# Altium PCB NE5532+TDA2030A.PcbDoc
Units mm, origin at the board's own origin, x right, y up, seen from the top; angles counter-clockwise.
Board outline 95.25 x 80.25 mm, 2 copper layers (Top Layer, Bottom Layer); 93 components, 52 nets, 243 pads, 17 vias.
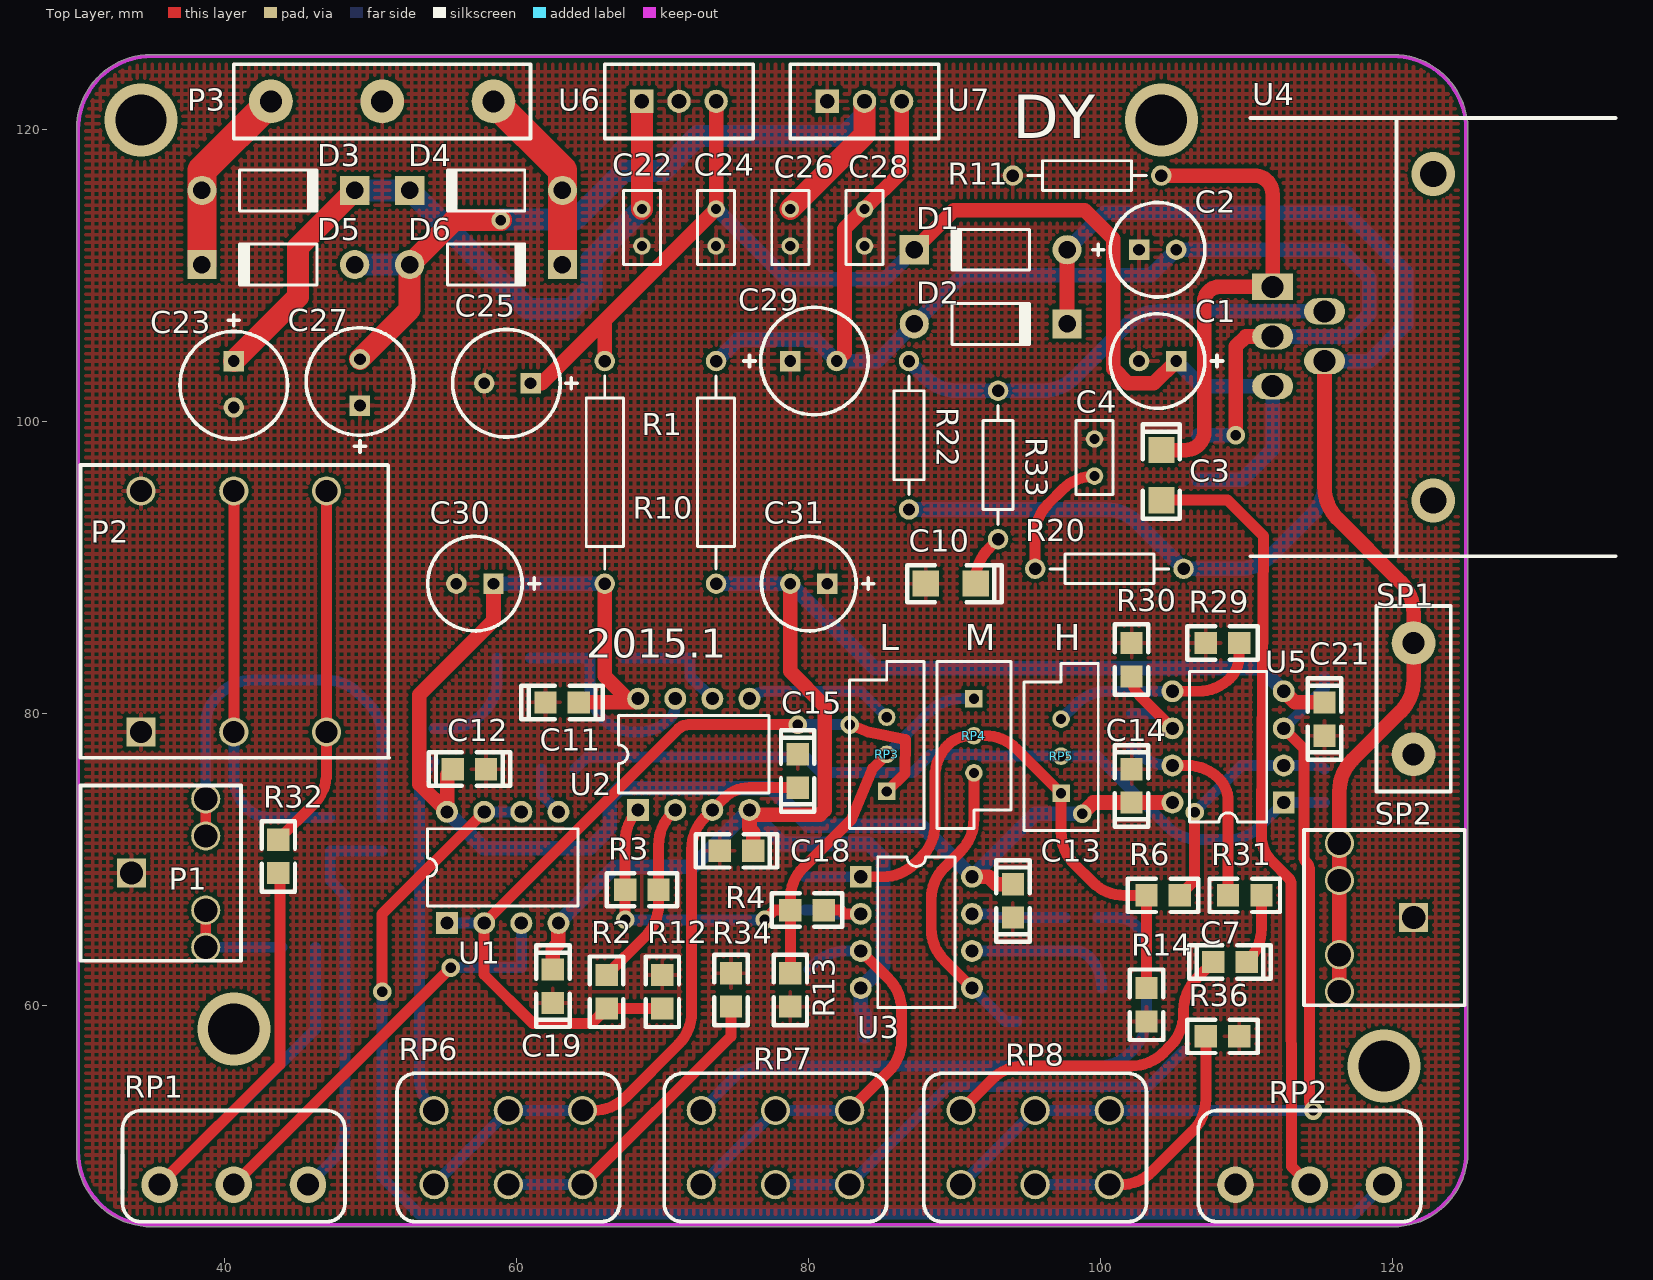
[diagram p0: Top Layer view]
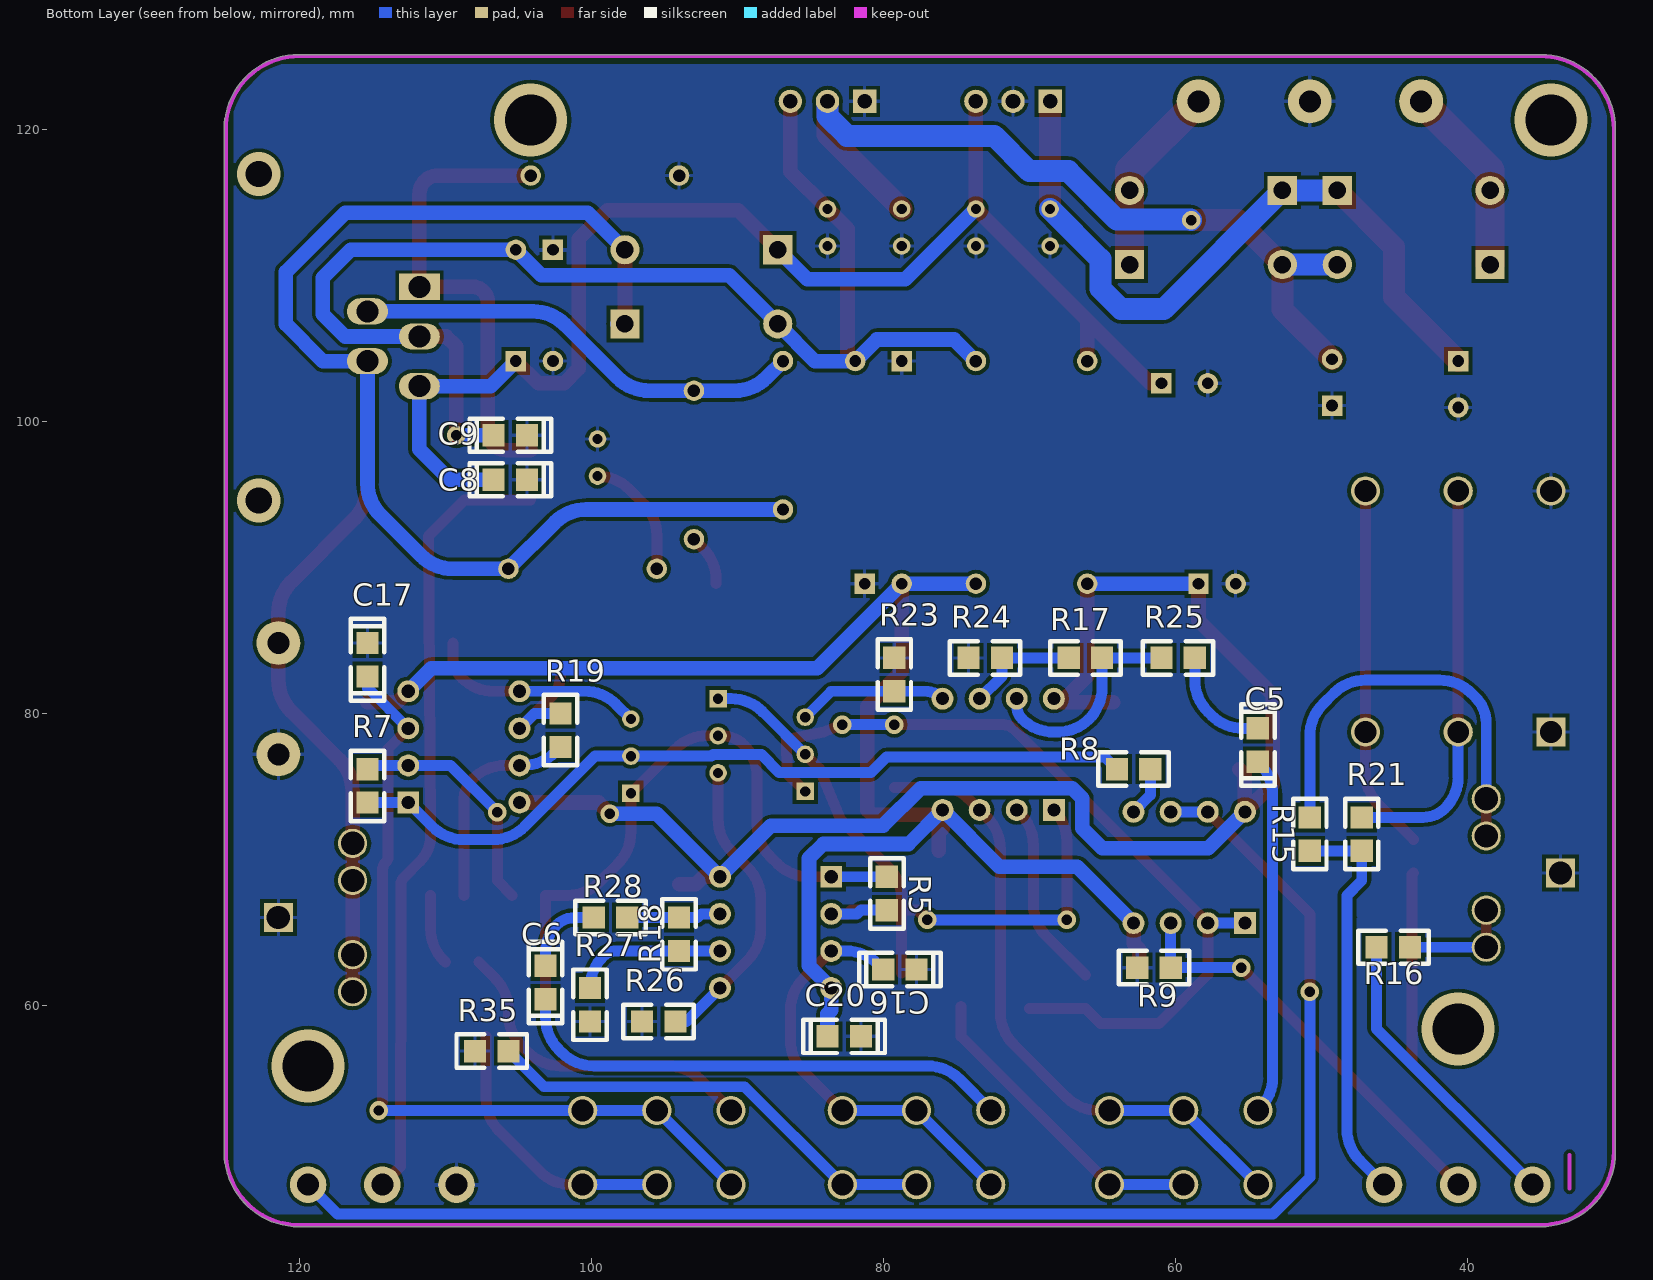
[diagram p1: Bottom Layer view, seen from below]

## Layer stack, top to bottom
Top Layer: signal copper 0.0356
Dielectric: dielectric 0.32, FR-4, Dk 4.8
Bottom Layer: signal copper 0.0356

## Board outline
29.873,50 cw(c30,50) 29.873,50.001 29.873,120 cw(c35,120) 35,125.127 cw(c35,125) 35.001,125.127 120,125.127 cw(c120,120) 125.127,120 cw(c125,120) 125.127,119.999 125.127,50 cw(c120,50) 120,44.873 cw(c120,45) 119.999,44.873 35,44.873 cw(c35,50)

## Design rules (kind name [scope] priority, off if disabled: settings)
Clearance [All] p1: gap=0.25
ComponentClearance [All] p1: gap=0.254 collisioncheckmode=0
PolygonConnect [All] p1: connectstyle=Relief reliefconductorwidth=0.254 reliefentries=4 polygonreliefangle="90 Angle"
RoutingCorners [All] p1: cornerstyle=Round minsetback=2.54 maxsetback=5
RoutingTopology [InNet('GND')] p1: topology=Vertical
RoutingVias [All] p1: holewidth=0.711 width=1.27 viastyle="Through Hole" minholewidth=0.711 minwidth=1.27 maxholewidth=0.711 maxwidth=1.27
SolderMaskExpansion [All] p1: expansion=0.102
TestPointUsage [All] p1: valid=0 allowmultiple=FALSE
Testpoint [All] p1: side=15 testpointundercomponent=TRUE minsize=1.016 maxsize=2.54 preferedsize=1.524 minholesize=0 maxholesize=1.016 preferedholesize=0.813 testpointgrid=0.025 style=1023 order=-539222988
Width Width_3 [InNet('NetR22_2')] p1: maxlimit=1 minlimit=1 preferedwidth=1
Width [InNet('NetC3_1')] p2: maxlimit=1 minlimit=1 preferedwidth=1
Width OUT [InNet('NetD1_1')] p3: maxlimit=1 minlimit=1 preferedwidth=1
Width GND [InNet('GND')] p4: maxlimit=0.1 minlimit=0.1 preferedwidth=0.1
Width -12V [InNet('-12V')] p5: maxlimit=1 minlimit=1 preferedwidth=1
Width +12V [InNet('+12V')] p6: maxlimit=1 minlimit=1 preferedwidth=1
Width V- [InNet('V-')] p7: maxlimit=1 minlimit=1 preferedwidth=1
Width V+ [InNet('V+')] p8: maxlimit=1 minlimit=1 preferedwidth=1
Width 7912 [InNet('7912')] p9: maxlimit=1.5 minlimit=1.5 preferedwidth=1.5
Width 7812 [InNet('7812')] p10: maxlimit=1.5 minlimit=1.5 preferedwidth=1.5
Width Width_2 [InNet('NetD4_1')] p11: maxlimit=2 minlimit=2 preferedwidth=2
Width Width_1 [InNet('NetD3_1')] p12: maxlimit=2 minlimit=2 preferedwidth=2
Width ALL [All] p13: maxlimit=1 minlimit=0.25 preferedwidth=0.75
15 further rules are at their usual default settings.

## Components (designator, comment, footprint, x,y, rotation, side; value= is the part's Value field where it differs from the comment)
C1 "U4" "C 6X12" 105.156,104.14 r180 top
C2 "U4" "C 6X12" 102.616,111.76 r0 top
C3 "Cap Pol1" c1206 104.14,98.044 r270 top
C4 "Cap" RAD-0.1 99.568,97.536 r90 top
C5 "473" c0805 54.356,76.708 r90 bottom
C6 "103" c0805 103.124,60.452 r90 bottom
C7 "222" c0805 107.696,62.992 r0 top
C8 "U4" c0805 106.68,96.012 r180 bottom
C9 "U4" C0805 106.68,99.06 r180 bottom
C10 "Cap Pol1" c1206 91.44,88.9 r180 top
C11 "U1" C0805 61.976,80.772 r0 top
C12 "U2" C0805 57.912,76.2 r180 top
C13 "U3" C0805 93.98,66.04 r90 top
C14 "U5" C0805 102.108,76.2 r270 top
C15 "473" c0805 79.248,77.216 r270 top
C16 "103" c0805 77.724,62.484 r0 bottom
C17 "222" c0805 115.316,84.836 r270 bottom
C18 "U1" C0805 76.2,70.612 r180 top
C19 "U2" C0805 62.484,62.484 r270 top
C20 "U3" C0805 83.82,57.912 r180 bottom
C21 "U5" C0805 115.316,80.772 r270 top
C22 "U4" RAD-0.1 68.58,113.284 r270 top
C23 "25V" "C 8X12" 40.64,104.14 r270 top
C24 "U4" RAD-0.1 73.66,113.284 r270 top
C25 "25V" "C 8X12" 60.96,102.616 r180 top
C26 "U4" RAD-0.1 78.74,113.284 r270 top
C27 "25V" "C 8X12" 49.276,101.092 r90 top
C28 "U4" RAD-0.1 83.82,113.284 r270 top
C29 "25V" "C 8X12" 78.74,104.14 r0 top
C30 "25V" "C 6X12" 58.42,88.9 r180 top
C31 "25V" "C 6X12" 81.28,88.9 r180 top
D1 "1N4007" DIO10.46-5.3x2.8 92.456,111.76 r180 top
D2 "1N4007" DIO10.46-5.3x2.8 92.456,106.68 r0 top
D3 "1N4007" DIO10.46-5.3x2.8 43.688,115.824 r0 top
D4 "1N4007" DIO10.46-5.3x2.8 57.912,115.824 r180 top
D5 "1N4007" DIO10.46-5.3x2.8 43.688,110.744 r180 top
D6 "1N4007" DIO10.46-5.3x2.8 57.912,110.744 r0 top
P1 "Header 5" 3.5MM 33.64,69.088 r0 top
P2 "Header 6" 6.5MM 34.29,78.74 r90 top
P3 "Header 3" h3 38.1,124.46 r0 top
R1 "1W" AXIAL-0.6 66.04,96.52 r90 top
R2 "0805" R0805 66.167,59.817 r90 top
R3 "0805" R0805 69.723,67.945 r180 top
R4 "0805" R0805 78.74,66.548 r0 top
R5 "0805" R0805 79.756,66.548 r90 bottom
R6 "0805" R0805 103.124,67.564 r0 top
R7 "0805" R0805 115.316,76.2 r270 bottom
R8 "0805" R0805 64.008,76.2 r180 bottom
R9 "0805" R0805 62.611,62.611 r180 bottom
R10 "1W" AXIAL-0.6 73.66,96.52 r90 top
R11 "Res2" AXIAL-0.4 99.06,116.84 r0 top
R12 "0805" R0805 69.977,62.103 r270 top
R13 "0805" R0805 78.74,59.944 r90 top
R14 "0805" R0805 103.124,58.928 r90 top
R15 "0805" R0805 50.8,70.612 r90 bottom
R16 "0805" R0805 46.228,64.008 r180 bottom
R17 "0805" R0805 65.024,83.82 r0 bottom
R18 "0805" R0805 93.98,66.04 r270 bottom
R19 "0805" R0805 102.108,77.724 r90 bottom
R20 "Res2" AXIAL-0.4 100.584,89.916 r0 top
R21 "0805" R0805 47.244,70.612 r90 bottom
R22 "Res2" AXIAL-0.4 86.868,99.06 r90 top
R23 "0805" R0805 79.248,83.82 r270 bottom
R24 "0805" R0805 74.168,83.82 r180 bottom
R25 "0805" R0805 60.96,83.82 r180 bottom
R26 "0805" R0805 96.52,58.928 r180 bottom
R27 "0805" R0805 100.076,58.928 r90 bottom
R28 "0805" R0805 97.536,66.04 r0 bottom
R29 "0805" R0805 107.188,84.836 r0 top
R30 "0805" R0805 102.108,84.836 r270 top
R31 "0805" R0805 108.712,67.564 r0 top
R32 "0805" R0805 43.688,69.088 r90 top
R33 "Res2" AXIAL-0.4 92.964,97.028 r90 top
R34 "0805" R0805 74.676,59.944 r90 top
R35 "0805" R0805 105.664,56.896 r0 bottom
R36 "SMD" R0805 107.188,57.912 r0 top
RP1 "LIN" RP-1 35.56,47.752 r0 top
RP2 "LIN" RP-1 109.22,47.752 r0 top
RP3 "LIN" VR5 85.344,77.216 r90 top
RP4 "LIN" VR5 91.313,78.486 r270 top
RP5 "LIN" VR5 97.282,77.089 r90 top
RP6 "100K" RP-2 64.516,47.752 r180 top
RP7 "100K" RP-2 82.804,47.752 r180 top
RP8 "100K" RP-2 100.584,47.752 r180 top
SP1 "Header 2" H2 121.412,84.836 r270 top
SP2 "Header 5" 3.5MM 121.412,66.04 r180 top
U1 "NE5532" DIP-8 59.055,69.469 r0 top
U2 "NE5532" DIP-8 72.136,77.216 r0 top
U3 "NE5532" DIP-8 87.376,65.024 r270 top
U4 "TDA2030A" TDA2030 111.76,109.22 r270 top
U5 "NE5532" DIP-8 108.712,77.724 r90 top
U6 "7812" TO-220 68.58,121.92 r0 top
U7 "7912" TO-220 81.28,121.92 r0 top

## Footprints (in the part's own frame and the unit in brackets; to place one, negate y for a bottom-side part, rotate by r counter-clockwise, add the part's x,y. Pads: shape width x height; smd on the part's side, far side on the other; paste and mask are expansions set on the pad)
3.5MM [mm]
  rect 2x2 hole 1.6: 1(0,0)
  round 2 hole 1.6: 2(5.08,5.08) 3(5.08,2.54) 4(5.08,-2.54) 5(5.08,-5.08)
  silkscreen extent -3.5,-6 7.5,6
6.5MM [mm]
  rect 2x2 hole 1.5: 1(0,0)
  round 2 hole 1.5: 2(16.5,0) 3(0,-6.35) 4(16.51,-6.35) 5(0,-12.7) 6(16.51,-12.7)
  silkscreen extent -1.75,-16.99 18.29,4.15
AXIAL-0.4 [mm] "Resistor; 2 Leads"
  round 1.4 hole 0.85: 1(-5.08,0) 2(5.08,0)
  silkscreen extent -4.06,-1.02 4.06,1.02
AXIAL-0.6 [mm] "Variable Resistor; 2 Leads"
  round 1.4 hole 0.85: 1(-7.62,0) 2(7.62,0)
  silkscreen extent -6.6,-1.27 6.6,1.27
c0805 [mil]
  rect 60x60 smd: 1(0,0) 2(90,0)
  silkscreen extent -65,-45 155,45
C0805 [mil]
  rect 60x60 smd: 1(0,0) 2(90,0)
  silkscreen extent -65,-45 155,45
c1206 [mil]
  rect 70.87x70 smd: 1(0,0) 2(135,0)
  silkscreen extent -70,-50 185,50
"C 6X12" [mm]
  rect 1.4x1.4 hole 0.8: 1(0,0)
  round 1.4 hole 0.8: 2(2.54,0)
  silkscreen extent -3.17,-3.24 4.5,3.24
"C 8X12" [mm]
  rect 1.4x1.4 hole 0.8: 1(0,0)
  round 1.4 hole 0.8: 2(3.175,0)
  silkscreen extent -3.17,-3.68 5.33,3.68
DIO10.46-5.3x2.8 [mm] "Diode, Axial; Body 5.2 x 2.7 mm (LxDia. max), Lead Dia. 0.86 mm (max)"
  round 2 hole 1.2: 1(-5.23,0)
  rect 2x2 hole 1.2: 2(5.23,0)
  silkscreen extent -2.65,-1.41 2.75,1.4
DIP-8 [mm] "DIP; 8 Leads; Row Spacing 7.62 mm; Pitch 2.54 mm"
  rect 1.5x1.5 hole 0.9: 1(-3.81,-3.81)
  round 1.5 hole 0.9: 2(-1.27,-3.81) 3(1.27,-3.81) 4(3.81,-3.81) 5(3.81,3.81) 6(1.27,3.81) 7(-1.27,3.81) 8(-3.81,3.81)
  silkscreen extent -5.15,-2.65 5.15,2.65
H2 [mm]
  round 3 hole 1.5: 1(0,0) 2(7.62,0)
  silkscreen extent -2.54,-2.54 10.16,2.54
h3 [mm]
  round 3 hole 1.5: 1(5.08,-2.54) 2(12.7,-2.54) 3(20.32,-2.54)
  silkscreen extent 2.54,-5.08 22.86,0
R0805 [mil]
  rect 60x60 smd: 1(0,0) 2(90,0)
  silkscreen extent -50,-45 140,45
RAD-0.1 [mm] "Indicating Instrument; 2 Leads"
  round 1.2 hole 0.7: 1(-1.27,0) 2(1.27,0)
  silkscreen extent -2.54,-1.27 2.54,1.27
RP-1 [mm]
  round 2.5 hole 1.5: 1(0,0) 2(10.16,0) 3(5.08,0)
  silkscreen extent -2.54,-2.54 12.7,5.08
RP-2 [mm]
  round 2 hole 1.5: 1(0,0) 2(10.16,0) 3(5.08,0) 4(0,-5.08) 5(10.16,-5.08) 6(5.08,-5.08)
  silkscreen extent -2.54,-7.62 12.7,2.54
TDA2030 [mm]
  rect 1.8x2.8 hole 1.5: 1(0,0)
  oval 1.8x2.8 hole 1.5: 2(1.68,3.556) 3(3.4,0) 4(5.08,3.556) 5(6.8,0)
  silkscreen extent -11.56,-1.52 18.44,23.48
TO-220 [mm]
  rect 1.6x1.6 hole 1: 1(0,0)
  round 1.6 hole 1: 2(2.54,0) 3(5.08,0)
  silkscreen extent -2.54,-2.54 7.62,2.54
VR5 [mm] "Potentiometer; 3 Leads"
  rect 1.2x1.2 hole 0.7: 1(-2.54,0)
  round 1.2 hole 0.7: 2(0,0) 3(2.54,0)
  silkscreen extent -5.08,-2.54 6.35,2.54

## Part data
C1 C2 C23 C25 C27 C29 C30 C31: library part "Cap Pol1", "Polarized Capacitor (Radial)"
C3 C10: "Polarized Capacitor (Radial)"
C4: "Capacitor"
C5 C6 C7 C8 C9 C11 C12 C13 C14 C15 C16 C17 C18 C19 C20 C21 C22 C24 C26 C28: library part Cap, "Capacitor"
D1 D2 D3 D4 D5 D6: library part "Diode 1N4007", "1 Amp General Purpose Rectifier"
P1 SP2: "Header, 5-Pin"
P2: "Header, 6-Pin"
P3: "Header, 3-Pin"
R1 R2 R3 R4 R5 R6 R7 R8 R9 R10 R12 R13 R14 R15 R16 R17 R18 R19 R21 R23 R24 R25 R26 R27 R28 R29 R30 R31 R32 R34 R35 R36: library part Res2, "Resistor"
R11 R20 R22 R33: "Resistor"
RP1 RP2 RP3 RP4 RP5: library part RPot, "Potentiometer"
RP6 RP7 RP8: library part RP-2
SP1: "Header, 2-Pin"

## Via types
v1: diameter 1.27, hole 0.711, Top Layer to Bottom Layer, 11 vias
v2: diameter 5, hole 3.5, Top Layer to Bottom Layer, 4 vias
v3: diameter 3, hole 1.8, Top Layer to Bottom Layer, 2 vias

## Nets (pads, with @x,y where several pads share a name; then routed paths per layer and width w, separated by ;. In a path a pad name is that pad's centre, name@x,y a point inside that pad or via, vN(x,y) a via of type N, cw(c..) or ccw(c..) an arc to the next point about the centre after c; other vN are vias at no path point)
7812: C22.1 C23.1 D3.2 D4.2 U6.1 | length 49.5
  Top Layer w1.5: C23.1 45.034,108.534 45.034,111.94 D3.2 ; C22.1 U6.1
  Bottom Layer w1.5: D3.2 D4.2 60.81,107.696 63.722,107.696 65.142,109.116 65.142,111.116 C22.1
7912: C26.1 C27.2 D5.1 D6.1 U7.2 | length 57.5
  Top Layer w1.5: C27.2 52.682,107.673 D6.1 55.73,113.792 v1(58.928,113.792) ; C26.1 83.82,119.634 U7.2
  Bottom Layer w1.5: D5.1 D6.1 ; v1(58.928,113.792) 58.96,113.824 64.008,113.824 67.329,117.145 70.002,117.145 72.415,119.558 82.474,119.558 83.82,120.904 U7.2
+12V: C1.1 C8.1 C24.1 C25.1 D1.2 R1.2 U4.5 U6.3 | length 90.8
  Top Layer w1: 61.722,102.616 C24.1 U6.3 ; R1.2 66.04,106.934 ; D1.2 89.918,114.452 98.908,114.452 100.838,112.522 100.838,103.632 101.854,102.616 103.632,102.616 C1.1
  Bottom Layer w1: C24.1 78.486,109.728 85.194,109.728 D1.2 ; C1.1 106.876,102.42 U4.5 111.76,98.095 109.677,96.012 C8.1
-12V: C2.2 C9.1 C28.1 C29.2 D2.1 R10.2 U4.3 U7.3 | length 90.7
  Top Layer w1: C29.2 82.448,104.673 82.448,113.182 C28.1 86.36,117.094 U7.3 ; v1(109.245,99.06) 109.245,105.156 109.909,105.82 U4.3
  Bottom Layer w1: R10.2 75.133,105.613 80.442,105.613 C29.2 84.686,104.14 D2.1 90.556,110.01 103.406,110.01 C2.2 116.459,111.76 118.364,109.855 118.364,107.344 116.84,105.82 U4.3 ; C9.1 v1(109.245,99.06)
GND: C1.2 C2.1 C4.2 C8.2 C9.2 C10.2 C11.1 C12.1 C13.1 C14.1 C15.1 C16.1 C17.1 C18.2 C19.2 C20.2 C21.2 C22.2 C23.2 C24.2 C25.2 C26.2 C27.1 C28.2 C29.1 C30.2 C31.1 P1.1 P2.1 P2.2 P3.2 R9.1 R11.1 R12.1 R13.1 R14.1 R23.1 R24.1 R26.1 R27.1 R29.1 R30.1 R34.2 R35.2 R36.2 RP2.1 SP1.2 SP2.1 U6.2 U7.1
L-IN: R15.1 R21.1 RP1.2 | length 27.8
  Bottom Layer w0.75: RP1.2 47.362,49.394 ccw(c45.194,51.562) 48.26,51.562 48.26,67.564 47.244,68.58 R21.1 R15.1
NetC3_1: C3.1 R11.2 U4.1 | length 32.5
  Top Layer w1: C3.1 105.816,98.044 ccw(c105.816,99.314) 107.086,99.314 107.086,108.204 cw(c108.102,108.204) 108.102,109.22 110.871,109.22 U4.1 111.76,115.57 ccw(c110.49,115.57) 110.49,116.84 R11.2
NetC3_2: C3.2 RP2.3 | length 53.6
  Top Layer w0.75: C3.2 108.661,94.615 111.125,92.151 110.998,72.39 110.998,71.628 ccw(c113.451,71.628) 111.716,69.894 112.85,68.76 cw(c112.417,68.326) 113.03,68.326 113.03,66.04 113.057,48.995 RP2.3
NetC4_1: C4.1 R20.1 | length 8.5
  Top Layer w0.75: R20.1 95.504,92.202 cw(c98.57,92.202) 96.402,94.37 97.4,95.368 cw(c99.568,93.2) C4.1
NetC5_1: C5.1 RP6.5 | length 24.5
  Bottom Layer w0.75: RP6.5 54.238,52.95 cw(c56.406,55.118) 53.34,55.118 53.34,74.422 cw(c56.406,74.422) 54.238,76.59 C5.1
NetC5_2: C5.2 R25.2 | length 7.7
  Bottom Layer w0.75: C5.2 55.372,78.994 ccw(c55.372,82.06) 57.54,79.892 57.776,80.128 ccw(c55.608,82.296) 58.674,82.296 R25.2
NetC6_1: C6.1 RP7.5 | length 34.7
  Bottom Layer w0.75: RP7.5 74.794,54.982 cw(c76.962,52.814) 76.962,55.88 99.822,55.88 ccw(c99.822,58.946) 101.99,56.778 102.226,57.014 ccw(c100.058,59.182) 103.124,59.182 C6.1
NetC6_2: C6.2 R28.2 | length 5.7
  Bottom Layer w0.75: R28.2 101.136,66.04 cw(c101.136,64.306) 102.362,65.532 cw(c100.522,63.692) 103.124,63.692 C6.2
NetC7_1: C7.1 RP8.5 | length 22.6
  Top Layer w0.75: RP8.5 92.574,54.982 cw(c94.742,52.814) 94.742,55.88 102.108,55.88 ccw(c102.108,58.946) 104.276,56.778 104.766,57.268 ccw(c102.598,59.436) 105.664,59.436 105.664,59.69 cw(c108.73,59.69) 106.562,61.858 C7.1
NetC7_2: C7.2 R31.2 | length 4.9
  Top Layer w0.75: C7.2 110.1,63.11 ccw(c107.932,65.278) 110.998,65.278 R31.2
NetC10_1: C10.1 R33.1 | length 3.5
  Top Layer w0.75: C10.1 91.44,89.154 cw(c94.506,89.154) 92.338,91.322 R33.1
NetC15_2: C15.2 RP6.2 RP6.4 RP6.6 U2.3 | length 43.7
  Top Layer w0.75: RP6.4 65.278,52.832 ccw(c65.278,55.898) 67.446,53.73 71.086,57.37 ccw(c68.918,59.538) 71.984,59.538 71.984,70.714 cw(c75.05,70.714) 72.882,72.882 74.221,74.221 cw(c75.933,72.509) 75.933,74.93 C15.2
  Bottom Layer w0.75: RP6.2 RP6.6 RP6.4
NetC16_2: C16.2 RP7.2 RP7.4 RP7.6 U3.3 | length 29.5
  Top Layer w0.75: RP7.4 85.462,55.49 ccw(c83.294,57.658) 86.36,57.658 86.36,59.69 ccw(c83.294,59.69) 85.462,61.858 U3.3
  Bottom Layer w0.75: RP7.2 RP7.6 RP7.4 ; C16.2 80.382,62.856 cw(c82.55,60.688) 82.55,63.754 U3.3
NetC17_2: C17.2 RP8.2 RP8.4 RP8.6 U5.3 | length 57.9
  Top Layer w0.75: U5.3 113.919,77.597 113.919,70.157 ccw(c114.353,70.157) 114.046,69.85 cw(c113.433,69.237) 114.3,69.237 114.3,53.445 ccw(c115.167,53.445) v1(114.554,52.832)
  Bottom Layer w0.75: RP8.2 RP8.6 v1(114.554,52.832) ; U5.3 115.265,81.737 115.316,81.737 C17.2
NetD1_1: D1.1 D2.2 R20.2 R22.1 SP1.1 SP2.2 SP2.3 SP2.4 SP2.5 U4.4 | length 130.9
  Top Layer w1: D2.2 D1.1 ; U4.4 115.316,95.504 ccw(c118.382,95.504) 116.214,93.336 120.514,89.036 cw(c118.346,86.868) 121.412,86.868 121.412,82.296 cw(c118.346,82.296) 120.514,80.128 117.23,76.844 ccw(c119.398,74.676) 116.332,74.676 SP2.5 SP2.4 SP2.3 ; SP2.2@116.376,61.004 SP2.2 SP2.3 ; SP2.3@116.376,63.456 SP2.3
  Bottom Layer w1: R22.1 100.33,93.98 cw(c100.33,90.914) 102.498,93.082 R20.2 109.474,89.916 ccw(c109.474,92.982) 111.642,90.814 114.418,93.59 ccw(c112.25,95.758) 115.316,95.758 U4.4 ; D2.2 D2.2@98.196,106.68 ; D1.1 100.226,114.3 116.84,114.3 120.904,110.236 120.904,106.68 118.364,104.14 U4.4@114.808,104.14
NetD3_1: D3.1 D5.2 P3.1 | length 13.1
  Top Layer w2: D5.2 38.458,117.198 P3.1
NetD4_1: D4.1 D6.2 P3.3 | length 13.1
  Top Layer w2: P3.3 63.142,117.198 D6.2
NetP1_2: P1.2 P1.3 R15.2 | length 29
  Top Layer w0.75: P1.3 P1.2
  Bottom Layer w0.75: P1.2 38.72,79.36 cw(c41.173,79.36) 39.438,81.094 39.742,81.398 cw(c41.91,79.23) 41.91,82.296 46.99,82.296 cw(c46.99,79.23) 49.158,81.398 49.902,80.654 cw(c47.734,78.486) 50.8,78.486 R15.2
NetP1_4: P1.4 P1.5 R16.2 | length 7.8
  Top Layer w0.75: P1.5 P1.4
  Bottom Layer w0.75: P1.5 R16.2
NetP2_3: P2.3 P2.4 R21.2 | length 27.8
  Top Layer w0.75: P2.3 P2.4
  Bottom Layer w0.75: P2.3 40.64,75.692 ccw(c43.706,75.692) 41.538,73.524 ccw(c43.049,75.035) 43.049,72.898 R21.2
NetP2_5: P2.5 P2.6 R32.2 | length 25.1
  Top Layer w0.75: R32.2 46.092,73.778 ccw(c43.924,75.946) 46.99,75.946 P2.6
NetR2_1: R2.1 R12.2 RP3.1 U1.1 U1.2 | length 58.7
  Top Layer w0.75: R12.2 R2.1 65.126,58.776 61.138,58.776 57.785,62.128 U1.2 71.095,78.969 cw(c71.769,78.294) 71.769,79.248 v1(79.248,79.248) ; v1(82.804,79.248) 84.074,78.74 86.614,78.232 86.583,75.915 RP3.1
  Bottom Layer w0.75: U1.1 U1.2 ; v1(79.248,79.248) v1(82.804,79.248)
NetR2_2: R2.2 R3.1 U2.2 | length 13
  Top Layer w0.75: R2.2 68.825,64.761 ccw(c66.657,66.929) 69.723,66.929 69.723,70.993 cw(c72.789,70.993) 70.621,73.161 U2.2
NetR3_2: R3.2 R4.1 R13.2 RP3.2 RP4.1 U2.1 | length 44
  Top Layer w0.75: v1(67.437,65.888) 67.437,71.26 cw(c70.472,71.26) U2.1 ; v1(76.987,65.888) 77.648,66.548 R4.1 ; R13.2 78.74,67.31 cw(c81.806,67.31) 79.638,69.478 82.922,72.762 84.359,76.231 RP3.2
  Bottom Layer w0.75: v1(67.437,65.888) v1(76.987,65.888) ; RP3.2 88.256,80.128 cw(c90.424,77.96) 90.424,81.026 RP4.1
NetR4_2: R4.2 R5.1 U3.2 | length 6.6
  Top Layer w0.75: R4.2 82.169,66.548 82.423,66.294 U3.2
  Bottom Layer w0.75: R5.1 81.534,66.548 81.788,66.294 U3.2
NetR5_2: R5.2 R6.1 R14.2 RP4.2 RP5.1 U3.1 | length 43.1
  Top Layer w0.75: U3.1 85.09,68.834 ccw(c85.09,71.9) 87.258,69.732 87.748,70.222 ccw(c85.58,72.39) 88.646,72.39 88.646,75.692 cw(c91.712,75.692) 89.544,77.86 cw(c91.055,76.349) 91.055,78.486 92.075,78.486 cw(c92.075,75.42) 94.243,77.588 RP5.1 97.282,71.882 ccw(c100.348,71.882) 98.18,69.714 99.432,68.462 ccw(c101.6,70.63) 101.6,67.564 R6.1 R14.2
  Bottom Layer w0.75: R5.2 U3.1
NetR6_2: R6.2 R7.1 U5.2 | length 16.4
  Top Layer w0.75: R6.2 106.426,68.58 v1(106.426,73.254)
  Bottom Layer w0.75: v1(106.426,73.254) 109.626,76.454 114.703,76.454 cw(c114.703,75.587) R7.1
NetR7_2: R7.2 R8.1 RP5.2 U5.1 | length 55.8
  Bottom Layer w0.75: R8.1 64.839,77.031 79.791,77.031 80.84,75.983 87.133,75.983 88.341,77.191 91.669,77.191 91.77,77.089 RP5.2 99.741,77.089 104.558,72.272 ccw(c106.726,74.44) 106.726,71.374 108.712,71.374 ccw(c108.712,74.44) 110.88,72.272 U5.1 R7.2
NetR8_2: R8.2 U1.5 | length 3.4
  Bottom Layer w0.75: R8.2 61.722,74.422 U1.5
NetR9_2: R9.2 RP1.3 U1.3 | length 28.9
  Top Layer w0.75: RP1.3 v1(55.499,62.611)
  Bottom Layer w0.75: v1(55.499,62.611) R9.2 U1.3
NetR17_1: R17.1 R25.1 U2.7 | length 15
  Bottom Layer w0.75: R25.1 R17.1 65.024,81.788 ccw(c68.09,81.788) 65.922,79.62 ccw(c68.046,81.744) 68.046,78.74 68.326,78.74 ccw(c68.326,81.806) 70.494,79.638 ccw(c69.596,80.536) 70.866,80.536 U2.7
NetR17_2: R17.2 R24.2 U2.6 | length 8
  Bottom Layer w0.75: R17.2 R24.2 71.882,82.55 U2.6
NetR18_1: R18.1 R28.1 U3.7 | length 6.5
  Bottom Layer w0.75: U3.7 92.456,66.294 92.71,66.04 R18.1 R28.1
NetR18_2: R18.2 R27.2 U3.6 | length 10.5
  Bottom Layer w0.75: U3.6 98.28,63.754 cw(c98.28,62.484) 99.178,63.382 cw(c97.01,61.214) R27.2
NetR19_1: R19.1 R31.1 U5.7 | length 14.8
  Top Layer w0.75: U5.7 105.918,76.454 cw(c105.918,73.388) 108.086,75.556 cw(c106.575,74.045) 108.712,74.045 R31.1
  Bottom Layer w0.75: R19.1 102.48,77.352 ccw(c104.648,79.52) 104.648,76.454 U5.7
NetR19_2: R19.2 R30.2 U5.6 | length 7.8
  Top Layer w0.75: R30.2 ccw(c103.948,82.55) 102.647,81.249 U5.6
  Bottom Layer w0.75: R19.2 103.886,80.01 U5.6
NetR22_2: R22.2 R33.2 U4.2 | length 31.1
  Bottom Layer w1: R22.2 88.002,103.006 ccw(c90.17,105.174) 90.17,102.108 96.012,102.108 ccw(c96.012,105.174) 98.18,103.006 101.816,106.642 cw(c103.984,104.474) 103.984,107.54 U4.2
NetR23_2: R23.2 RP3.3 U2.5 | length 10.3
  Bottom Layer w0.75: U2.5 cw(c77.172,79.8) 77.172,81.534 83.566,81.534 RP3.3
NetR26_2: R26.2 RP4.3 U3.5 | length 20.7
  Top Layer w0.75: U3.5 89.29,63.11 cw(c91.458,65.278) 88.392,65.278 88.392,67.31 cw(c91.458,67.31) 89.29,69.478 90.415,70.603 ccw(c88.247,72.771) 91.313,72.771 RP4.3
  Bottom Layer w0.75: U3.5 93.472,58.928 R26.2
NetR29_2: R29.2 RP5.3 U5.5 | length 15
  Top Layer w0.75: U5.5 106.68,81.534 ccw(c106.68,84.6) 108.848,82.432 ccw(c107.337,83.943) 109.474,83.943 R29.2
  Bottom Layer w0.75: RP5.3 98.289,80.636 cw(c100.457,78.468) 100.457,81.534 U5.5
NetR34_1: R34.1 RP6.1 RP6.3 | length 21.5
  Top Layer w0.75: RP6.1 74.676,57.912 R34.1
  Bottom Layer w0.75: RP6.3 RP6.1
NetR35_1: R35.1 RP7.1 RP7.3 | length 31.7
  Bottom Layer w0.75: RP7.3 RP7.1 89.509,54.457 103.225,54.457 R35.1
NetR36_1: R36.1 RP8.1 RP8.3 | length 18.9
  Top Layer w0.75: RP8.1 101.346,47.752 ccw(c101.346,50.818) 103.514,48.65 106.29,51.426 ccw(c104.122,53.594) 107.188,53.594 R36.1
  Bottom Layer w0.75: RP8.3 RP8.1
NetRP2_2: RP2.2 U1.6 U1.7 | length 100.9
  Top Layer w0.75: v1(50.8,60.96) 50.8,66.294 U1.7
  Bottom Layer w0.75: v1(50.8,60.96) 50.8,48.26 53.308,45.752 117.38,45.752 RP2.2 ; U1.7 U1.6
R-IN: R16.1 R32.1 RP1.1 | length 45.5
  Top Layer w0.75: RP1.1 43.79,55.982 43.79,68.986 R32.1
  Bottom Layer w0.75: RP1.1 46.228,58.42 R16.1
V+: C11.2 C12.2 C13.2 C14.2 C30.1 R1.1 U1.8 U2.8 U3.8 U5.8 | length 103.9
  Top Layer w1: C12.2 55.245,75.819 U1.8 53.34,75.184 53.34,81.28 58.42,86.36 C30.1 ; C11.2 68.072,80.772 U2.8 67.564,81.026 66.04,82.55 R1.1 ; U3.8 92.329,68.834 92.837,68.326 C13.2 ; v1(98.73,73.152) 99.492,73.914 C14.2 U5.8
  Bottom Layer w1: U1.8 57.745,70.779 64.995,70.779 66.37,72.154 66.37,74.22 67.056,74.906 77.445,74.906 80.025,72.326 87.694,72.326 U3.8 95.504,73.152 v1(98.73,73.152) ; C30.1 R1.1
V-: C18.1 C19.1 C20.1 C21.1 C31.2 R10.1 U1.4 U2.4 U3.4 U5.4 | length 112.9
  Top Layer w1: C19.1 62.484,63.881 62.865,64.262 U1.4 ; C18.1 76.2,71.882 75.946,72.136 U2.4 76.284,73.068 80.772,73.068 81.11,73.406 81.11,80.521 78.74,82.891 C31.2 ; U5.4 113.284,80.772 C21.1
  Bottom Layer w1: U1.4 66.726,69.52 72.06,69.52 U2.4 78.276,71.076 84.118,71.076 85.09,70.104 85.09,62.738 U3.4 83.566,59.69 83.82,59.436 C20.1 ; R10.1 C31.2 84.531,83.109 110.947,83.109 U5.4
copper on no net:
  other v2: 119.38,55.88 40.64,58.42 34.29,120.65 104.14,120.65
  other v3: 122.758,94.59 122.758,116.942

## Polygon pours and split planes (outlines as drawn)
GND on Top Layer (hatched 90Degree grid 0.508 track 0.25): 30.48,121.92 33.02,124.46 121.92,124.46 124.46,121.92 124.46,48.26 121.92,45.72 33.02,45.72 30.48,48.26
GND on Bottom Layer (solid): 30.48,121.92 33.02,124.46 121.92,124.46 124.46,121.92 124.46,48.26 121.92,45.72 33.02,45.72 30.48,48.26

## Keep-outs
Keep-Out Layer:
  lines w0.254: 33.02,47.498 33.02,49.784 ; 35,125 ccw(c35,120) 30,120 30,50 ccw(c35,50) 35,45 120,45 ccw(c120,50) 125,50 125,120 ccw(c120,120) 120,125 35,125 ; 35,125 35,125

## Silkscreen, mask and mechanical layers (free items; w line width, h text height)
Top Overlay:
  text "DY" at 93.98,119.38 h3
  text "L" at 84.836,84.328 h1.8
  text "M" at 90.678,84.328 h1.8
  text "H" at 96.774,84.328 h1.8
  text "2015.1" at 64.77,83.82 h2